# EAGLE board PCB1 1.1 (EAGLE 6.3)
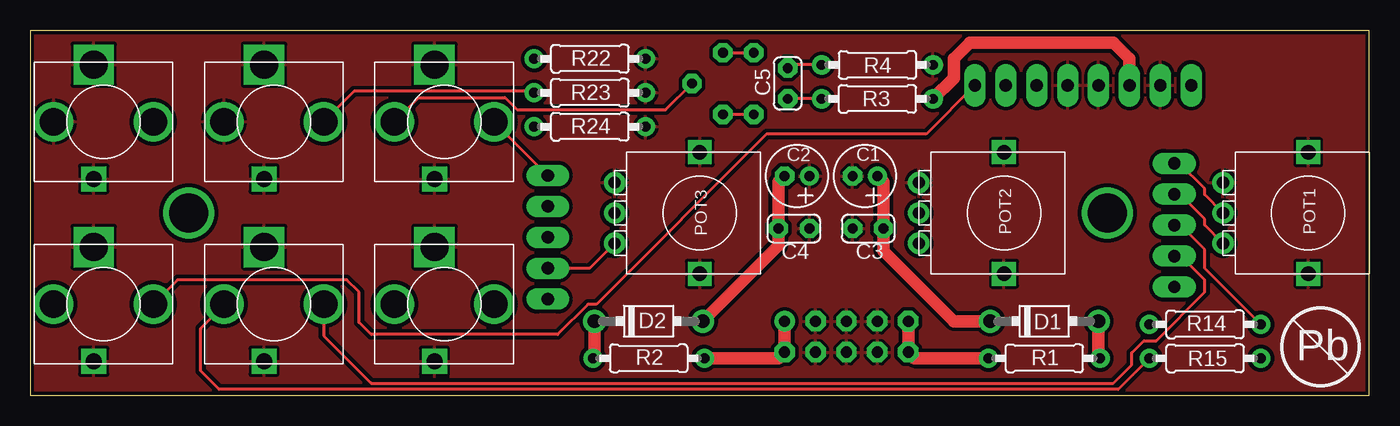
[diagram p0: board, top side]
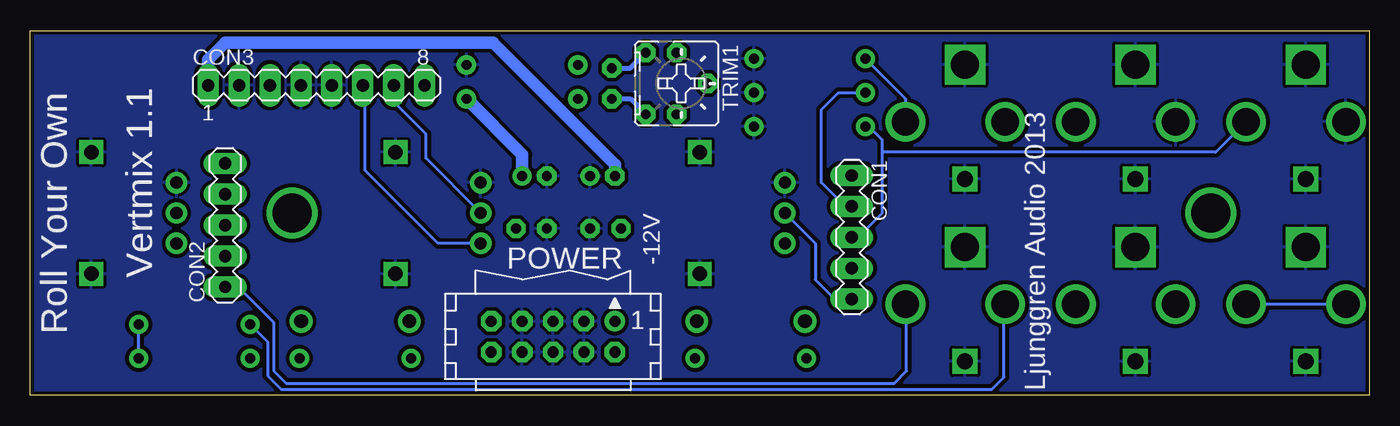
[diagram p1: board, bottom side, seen from below]

Size 110 x 30 mm. Coordinates in mm from the lower left corner, seen from the top.
Outline: 0,0 110,0 110,30 0,30 0,0
Copper layers (1*16): Top 0.035mm / dielectric 1.5mm / Bottom 0.035mm
Design rules "ITEADstudio_DRC 15 mil pads": minimum track width 6mil, minimum drill 12mil, track to track 6mil, track to pad 6mil, pad to pad 6mil, via to via 6mil, smd to smd 0mil, copper to edge 10mil, drill to drill 10mil, minimum pad ring 15mil, minimum via ring 6mil, stop-mask expansion 2mil, vias tented up to drill 100mil, thermal gap 10mil

## Footprints (pad centres in the part's own frame; a part is rotated, then mirrored left to right if it is on the bottom)
E2-5 = drill 0.813 pad 1.27: + -1.016,0 | drill 0.813 pad 1.27 octagon: - 1.016,0
C025-024X044 = drill 0.813 octagon: 1 -1.27,0; 2 1.27,0
MA05-1 = drill 1.016 long: 1 -5.08,0; 2 -2.54,0; 3 0,0; 4 2.54,0; 5 5.08,0
MA08-1 = drill 1.016 long: 1 -8.89,0; 2 -6.35,0; 3 -3.81,0; 4 -1.27,0; 5 1.27,0; 6 3.81,0; 7 6.35,0; 8 8.89,0
DO41-7 = drill 1.118: A 4.445,0; C -4.445,0
ERTHENVAR = drill 2.3 square: RING1 -4.7,-0.8 | drill 1.3 square: RING2 4.7,-0.8 | drill 2.25: SHUNT 0,-4.1; TIP 0,4.1
POT-ALPHA9 = drill 1.2 square: GND$1 -5,0; GND$2 5,0 | drill 1: LEFT -2.5,-7; MID 0,-7; RIGHT 2.5,-7
CON10L = drill 0.914: 1 5.08,1.27 | drill 0.914 octagon: 2 5.08,-1.27; 3 2.54,1.27; 4 2.54,-1.27; 5 0,1.27; 6 0,-1.27; 7 -2.54,1.27; 8 -2.54,-1.27; 9 -5.08,1.27; 10 -5.08,-1.27
0207/9 = drill 0.813: 1 -4.58,0; 2 4.58,0
B25P = drill 0.813 octagon: A -2.54,0; AA -2.54,-2.54; E 2.54,0; EE 2.54,-2.54; S 0,2.54

## Placement (x,y rotation side)
C1  10uF  [E2-5]  68.58,18.03 180 top
C2  10uF  [E2-5]  62.99,18.03 180 top
C3  100nF  [C025-024X044]  68.83,13.72 180 top
C4  100nF  [C025-024X044]  62.74,13.72 180 top
C5  100nF  [C025-024X044]  62.23,25.65 90 top
CON1  [MA05-1]  42.5,13 270 bottom
CON2  [MA05-1]  94,14 90 bottom
CON3  [MA08-1]  86.5,25.5 0 bottom
D1  SB130  [DO41-7]  83.31,6.1 0 top
D2  SB130  [DO41-7]  50.8,6.1 0 top
IN1  ERTHENVAR_3.5MM_JACK  [ERTHENVAR]  34,22.5 270 top
IN2  ERTHENVAR_3.5MM_JACK  [ERTHENVAR]  20,22.5 270 top
IN3  ERTHENVAR_3.5MM_JACK  [ERTHENVAR]  6,22.5 270 top
OUT1  ERTHENVAR_3.5MM_JACK  [ERTHENVAR]  34,7.5 270 top
OUT2  ERTHENVAR_3.5MM_JACK  [ERTHENVAR]  20,7.5 270 top
OUT3  ERTHENVAR_3.5MM_JACK  [ERTHENVAR]  6,7.5 270 top
POT1  100K  [POT-ALPHA9]  105,15 270 top
POT2  100K  [POT-ALPHA9]  80,15 270 top
POT3  100K  [POT-ALPHA9]  55,15 270 top
POWER  [CON10L]  67.06,4.83 0 bottom
R1  10R  [0207/9]  83.31,3.05 0 top
R2  10R  [0207/9]  50.8,3.05 180 top
R3  2.2K  [0207/9]  69.6,24.38 0 top
R4  2.2K  [0207/9]  69.6,27.18 180 top
R14  100K  [0207/9]  96.52,5.84 0 top
R15  100K  [0207/9]  96.52,3.05 0 top
R22  1M  [0207/9]  45.97,27.69 0 top
R23  1M  [0207/9]  45.97,24.89 0 top
R24  1M  [0207/9]  45.97,22.1 0 top
TRIM1  25K  [B25P]  56.9,25.65 270 bottom

## Library data of the parts
C1-C5 D1 D2 IN1-IN3 OUT1-OUT3 POT1-POT3 R1-R4 R14 R15 R22-R24 TRIM1 = Roll Your Own
CON1-CON3 POWER = Roll Your Own; OC_FARNELL: unknown; OC_NEWARK: unknown

## Nets
0V: C1.- C2.+ C3.2 C4.1 CON3.2 CON3.4 CON3.5 IN1.RING1 IN1.RING2 IN2.RING1 IN2.RING2 IN2.SHUNT IN3.RING1 IN3.RING2 IN3.SHUNT OUT1.RING1 OUT1.RING2 OUT2.RING1 OUT2.RING2 OUT3.RING1 OUT3.RING2 POT1.GND$1 POT1.GND$2 POT1.LEFT POT2.GND$1 POT2.GND$2 POT2.LEFT POT3.GND$1 POT3.GND$2 POT3.LEFT POWER.3 POWER.4 POWER.5 POWER.6 POWER.7 POWER.8 R4.1 R22.2 R23.2 R24.2
+12V: C1.+ C3.1 CON3.3 D1.C R3.2
-12V: C2.- C4.2 CON3.1 D2.A
N$1: POWER.9 POWER.10 R1.1
N$2: POWER.1 POWER.2 R2.1
N$4: C5.2 R4.2 TRIM1.A TRIM1.AA
N$5: D1.A R1.2
N$6: D2.C R2.2
N$7: C5.1 R3.1 TRIM1.E TRIM1.EE
N$8: IN1.SHUNT TRIM1.S
N$9: CON1.1 IN1.TIP R22.1
N$10: CON1.2 IN2.TIP R23.1
N$11: CON1.3 IN3.TIP R24.1
N$19: CON2.1 OUT1.TIP
N$20: CON2.2 OUT2.TIP
N$26: OUT1.SHUNT R14.1
N$27: OUT2.SHUNT R15.1
N$33: CON2.3 R14.2 R15.2
OUT: CON3.8 OUT3.SHUNT OUT3.TIP
POT1M: CON2.5 POT1.MID
POT1R: CON2.4 POT1.RIGHT
POT2M: CON3.7 POT2.MID
POT2R: CON3.6 POT2.RIGHT
POT3M: CON1.5 POT3.MID
POT3R: CON1.4 POT3.RIGHT

## Tracks (layer width: path | path; a pad name or v marks a point on that pad's centre or on a via)
0V
  pour Bottom (isolate 0.305): 0.1,30.07 110.03,30.07 110.03,0 0,0 0,30.07
  pour Top (isolate 0.305): 0.1,30.07 110.03,30.07 110.03,0 -0.1,0 -0.1,30.07 -0.1,30.18
+12V
  Top 1.016: D1.C 75.9,6.1 70.1,11.9 C3.1 70.1,17.53 C1.+ | R3.2 75.88,26.09 75.88,27.69 77.2,29 89,29 90.31,27.69 CON3.3
  Bottom 1.016: C1.+ 69.6,19.8 R3.2
-12V
  Top 1.016: D2.A 61.47,12.32 C4.2 61.47,17.53 C2.-
  Bottom 1.016: C2.- 61.98,18.98 72,29 94,29 95.39,27.61 CON3.1
BFDC  (via drill 3.2)
  other vias: 88.5,15
N$1
  Top 1.016: POWER.9 POWER.10 72.64,3.05 R1.1
N$2
  Top 1.016: POWER.1 POWER.2 61.47,3.05 R2.1
N$3  (via drill 3.2)
  other vias: 13,15
N$4
  Top 0.254: TRIM1.A TRIM1.AA | R4.2 62.48,27.18 C5.2
  Bottom 0.406: C5.2 60.71,26.92 TRIM1.AA
N$5
  Top 1.016: R1.2 87.76,3.18 D1.A
N$6
  Top 1.016: R2.2 46.35,3.18 D2.C
N$7
  Top 0.254: TRIM1.E TRIM1.EE | R3.1 C5.1
  Bottom 0.406: C5.1 60.71,24.38 TRIM1.EE
N$8
  Top 0.254: IN1.SHUNT 31.9,24.5 39,24.5 40,23.5 52.2,23.5 TRIM1.S
N$9
  Top 0.254: CON1.1 38.1,22.48 IN1.TIP
  Bottom 0.254: R22.1 38.1,24.39 IN1.TIP
N$10
  Top 0.254: R23.1 41.29,25 26.6,25 IN2.TIP
  Bottom 0.254: CON1.2 42.54,15.5 43,15.5 45,17.5 45,23.5 43.61,24.89 R23.1
N$11
  Bottom 0.254: CON1.3 42,13 40,15 40,20 | 40,20 40,21 41.1,22.1 R24.1 | IN3.TIP 12.6,20 40,20
N$19
  Bottom 0.254: CON2.1 92.92,8.92 90,6 90,2 89,1 39,1 38,2 38,7.4 OUT1.TIP
N$20
  Top 0.254: OUT2.TIP 24.1,4.9 28,1 89,1 90.5,2.5 90.5,3.5 91.5,4.5 92.5,4.5 96.5,8.5 96.5,9.5 95,11 94.46,11 CON2.2
N$26
  Bottom 0.254: R14.1 90.5,4.4 90.5,1.6 89.41,0.51 30.99,0.51 30,1.5 30,7.4 OUT1.SHUNT
N$27
  Top 0.254: R15.1 89.39,0.5 15.5,0.5 14,2 14,5.5 15.9,7.4 OUT2.SHUNT
N$33
  Top 0.254: R14.2 96.5,10.44 96.5,12 94.5,14 CON2.3
  Bottom 0.254: R15.2 R14.2
OUT
  Top 0.254: CON3.8 73.61,21.5 60.5,21.5 46.5,7.5 45.82,7.5 43.32,5 28,5 27,6 27,8.5 26,9.5 12.1,9.5 OUT3.TIP
  Bottom 0.254: OUT3.SHUNT OUT3.TIP
POT1M
  Top 0.254: POT1.MID 96.5,16.5 96.5,17 94.42,19.08 CON2.5
POT1R
  Top 0.254: POT1.RIGHT 96.5,14 96.5,14.5 94.46,16.54 CON2.4
POT2M
  Bottom 0.254: POT2.MID 77.5,19.5 77.5,21.5 80.15,24.15 CON3.7
POT2R
  Bottom 0.254: POT2.RIGHT 76.5,12.5 82.5,18.5 82.5,25.31 CON3.6
POT3M
  Bottom 0.254: POT3.MID 45.5,12.5 45.5,9.5 43.92,7.92 CON1.5
POT3R
  Top 0.254: POT3.RIGHT 45.96,10.46 CON1.4

## Text on the board
tPlace: Pb
bPlace: Vertmix 1.1 | -12V | Roll Your Own | Ljunggren Audio 2013